# Altium PCB adapter.PcbDoc
Units mm, origin at the board's own origin, x right, y up, seen from the top; angles counter-clockwise.
Board outline 73.41 x 30.61 mm, 2 copper layers (Top Layer, Bottom Layer); 28 components, 29 nets, 120 pads, 0 vias.
Unrouted connection lines stored in the file: 26.
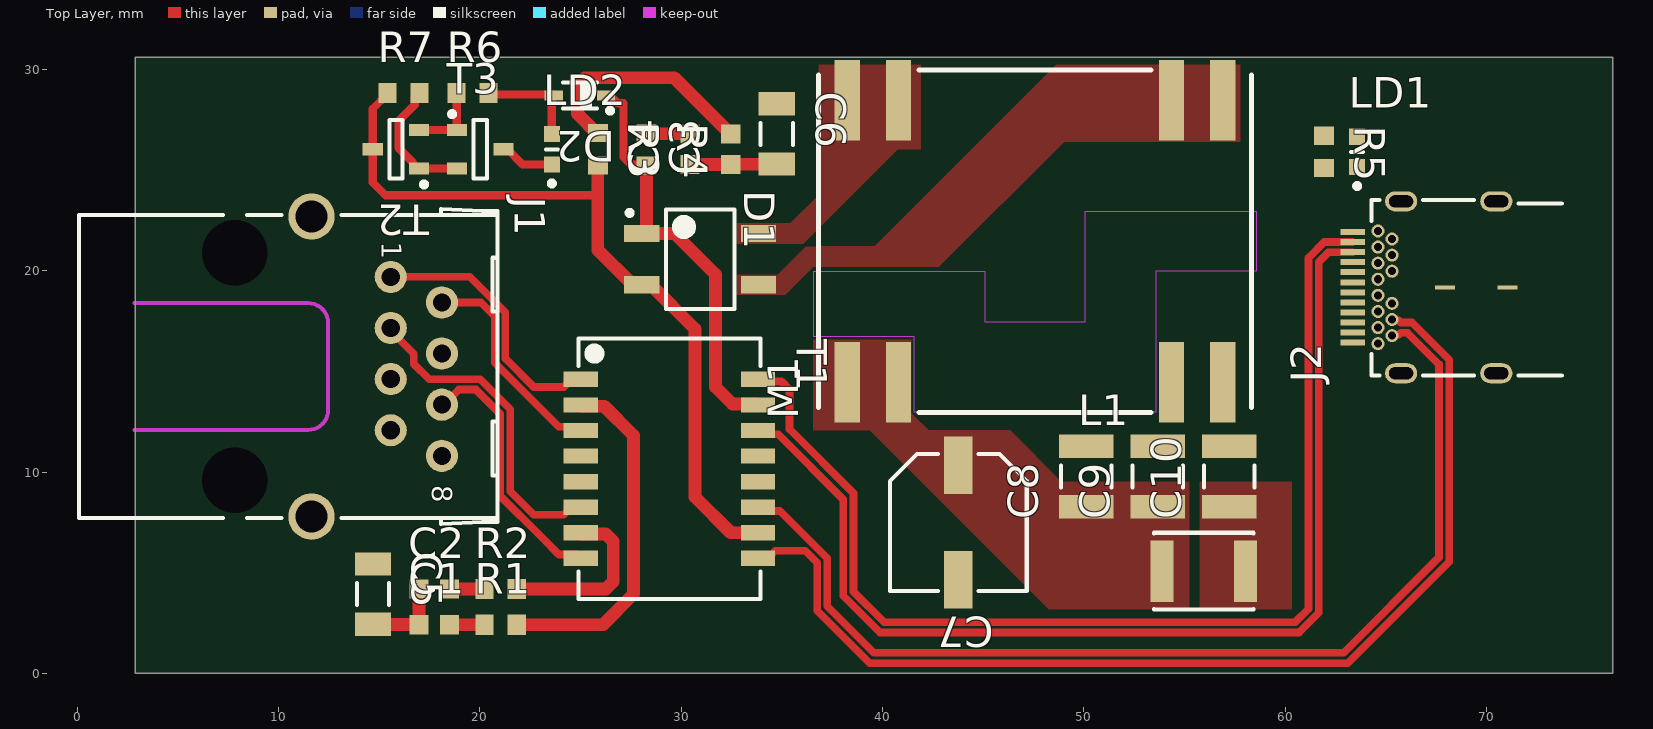
[diagram p0: Top Layer view]
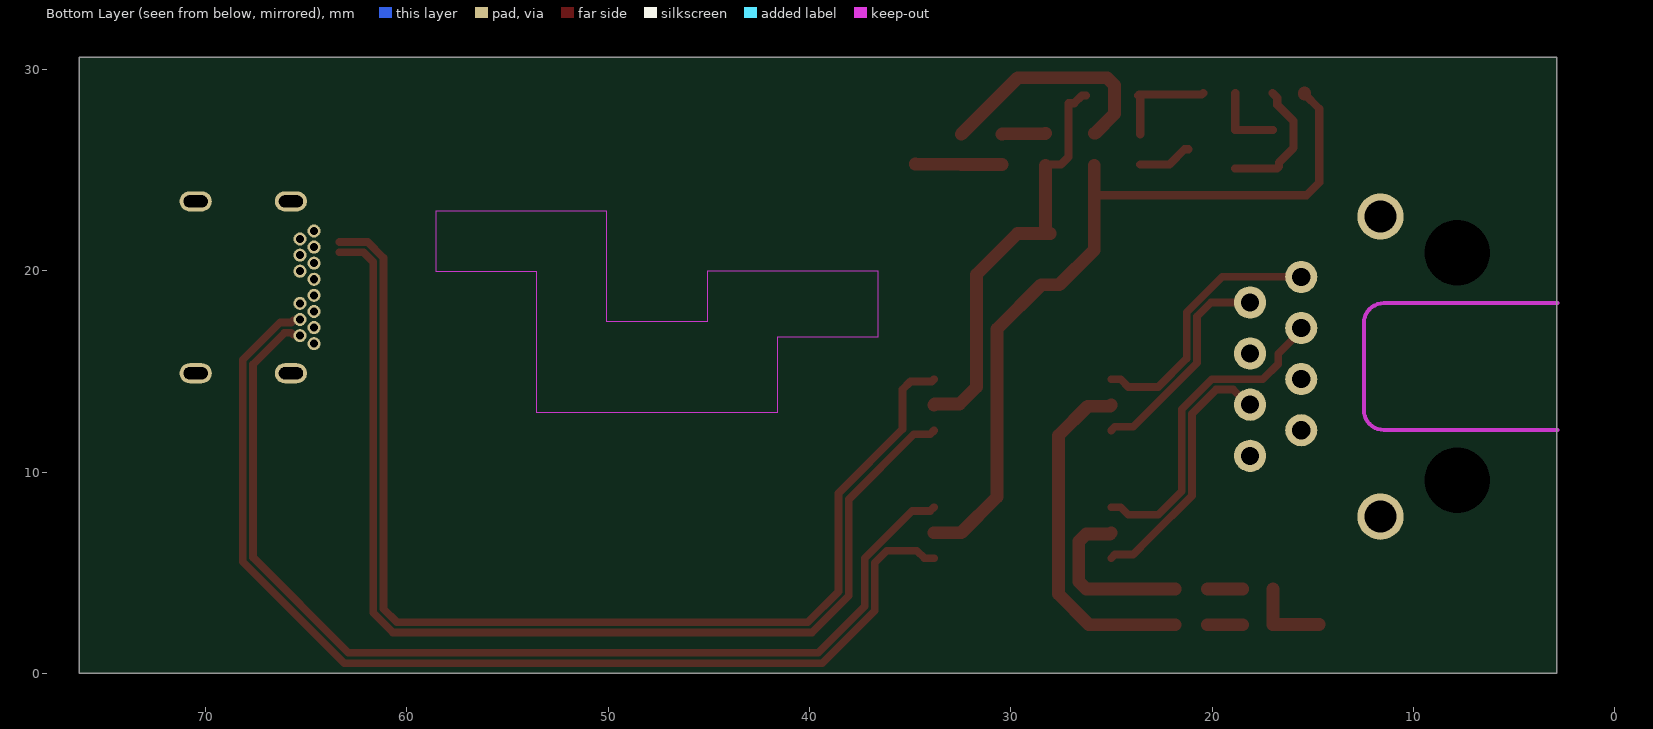
[diagram p1: Bottom Layer view, seen from below]
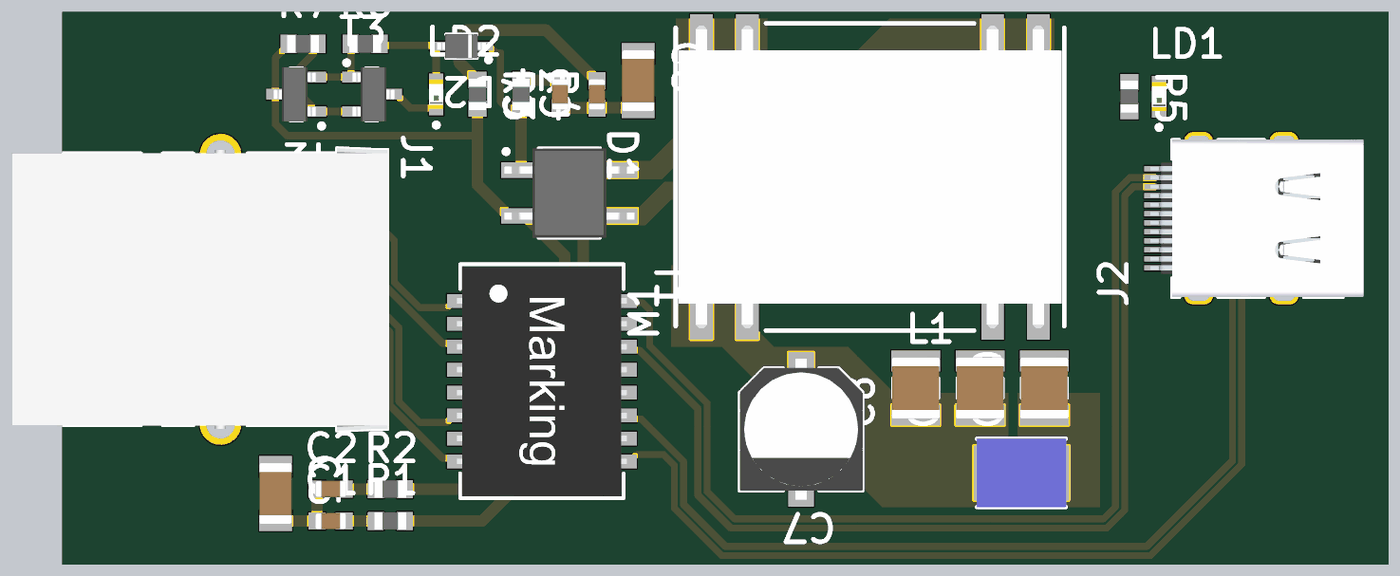
[diagram p2: 3D render of the assembled board from above, using the file's embedded part models]

## Layer stack, top to bottom
Top Solder: solder mask 0.0102, Solder Resist, Dk 3.5
Top Layer: signal copper 0.0356
Dielectric 1: dielectric 0.32, FR-4, Dk 4.8
Bottom Layer: signal copper 0.0356
Bottom Solder: solder mask 0.0102, Solder Resist, Dk 3.5

## Board outline
2.876,0 2.876,30.607 76.282,30.607 76.282,0

## Design rules (kind name [scope] priority, off if disabled: settings)
BoardOutlineClearance [All] p1: gap=0.2 ignorepadtopadclearanceinfootprint=FALSE
Clearance [All] p1: gap=0.127 ignorepadtopadclearanceinfootprint=FALSE except(0.25: Arc-Hole Track-Hole SMDPad-Hole THPad-Hole Via-Hole Fill-Hole Poly-Hole Region-Hole Text-Hole)
ComponentClearance [All] p1: gap=0.127 collisioncheckmode=3 verticalgap=0.127 showdistances=TRUE
DiffPairsRouting "Schematic Differential Pairs Routing_9" [InNet('ETHU_TX_N')] p1: maxlimit=0.127 minlimit=0.127 mostfreqgap=0.127 toplayer_minwidth=0.381 toplayer_maxwidth=0.381 toplayer_prefwidth=0.381 bottomlayer_minwidth=0.381 bottomlayer_maxwidth=0.381 bottomlayer_prefwidth=0.381 maxuncoupledlength=6.35
DiffPairsRouting "Schematic Differential Pairs Routing_8" [InNet('ETHU_RX_N')] p2: maxlimit=0.127 minlimit=0.127 mostfreqgap=0.127 toplayer_minwidth=0.381 toplayer_maxwidth=0.381 toplayer_prefwidth=0.381 bottomlayer_minwidth=0.381 bottomlayer_maxwidth=0.381 bottomlayer_prefwidth=0.381 maxuncoupledlength=6.35
DiffPairsRouting "Schematic Differential Pairs Routing_7" [InNet('ETHU_TX_P')] p3: maxlimit=0.127 minlimit=0.127 mostfreqgap=0.127 toplayer_minwidth=0.381 toplayer_maxwidth=0.381 toplayer_prefwidth=0.381 bottomlayer_minwidth=0.381 bottomlayer_maxwidth=0.381 bottomlayer_prefwidth=0.381 maxuncoupledlength=6.35
DiffPairsRouting "Schematic Differential Pairs Routing_6" [InNet('ETHU_RX_P')] p4: maxlimit=0.127 minlimit=0.127 mostfreqgap=0.127 toplayer_minwidth=0.381 toplayer_maxwidth=0.381 toplayer_prefwidth=0.381 bottomlayer_minwidth=0.381 bottomlayer_maxwidth=0.381 bottomlayer_prefwidth=0.381 maxuncoupledlength=6.35
DiffPairsRouting "Schematic Differential Pairs Routing_5" [InNet('PVBUS')] p5: maxlimit=0.127 minlimit=0.127 mostfreqgap=0.127 toplayer_minwidth=0.381 toplayer_maxwidth=0.381 toplayer_prefwidth=0.381 bottomlayer_minwidth=0.381 bottomlayer_maxwidth=0.381 bottomlayer_prefwidth=0.381 maxuncoupledlength=6.35
DiffPairsRouting "Schematic Differential Pairs Routing_4" [InNet('GND')] p6: maxlimit=0.127 minlimit=0.127 mostfreqgap=0.127 toplayer_minwidth=0.381 toplayer_maxwidth=0.381 toplayer_prefwidth=0.381 bottomlayer_minwidth=0.381 bottomlayer_maxwidth=0.381 bottomlayer_prefwidth=0.381 maxuncoupledlength=6.35
DiffPairsRouting "Schematic Differential Pairs Routing_3" [InNet('ETHJ_RX_N')] p7: maxlimit=0.127 minlimit=0.127 mostfreqgap=0.127 toplayer_minwidth=0.381 toplayer_maxwidth=0.381 toplayer_prefwidth=0.381 bottomlayer_minwidth=0.381 bottomlayer_maxwidth=0.381 bottomlayer_prefwidth=0.381 maxuncoupledlength=6.35
DiffPairsRouting "Schematic Differential Pairs Routing_2" [InNet('ETHJ_TX_N')] p8: maxlimit=0.127 minlimit=0.127 mostfreqgap=0.127 toplayer_minwidth=0.381 toplayer_maxwidth=0.381 toplayer_prefwidth=0.381 bottomlayer_minwidth=0.381 bottomlayer_maxwidth=0.381 bottomlayer_prefwidth=0.381 maxuncoupledlength=6.35
DiffPairsRouting "Schematic Differential Pairs Routing_1" [InNet('ETHJ_RX_P')] p9: maxlimit=0.127 minlimit=0.127 mostfreqgap=0.127 toplayer_minwidth=0.381 toplayer_maxwidth=0.381 toplayer_prefwidth=0.381 bottomlayer_minwidth=0.381 bottomlayer_maxwidth=0.381 bottomlayer_prefwidth=0.381 maxuncoupledlength=6.35
DiffPairsRouting "Schematic Differential Pairs Routing" [InNet('ETHJ_TX_P')] p10: maxlimit=0.127 minlimit=0.127 mostfreqgap=0.127 toplayer_minwidth=0.381 toplayer_maxwidth=0.381 toplayer_prefwidth=0.381 bottomlayer_minwidth=0.381 bottomlayer_maxwidth=0.381 bottomlayer_prefwidth=0.381 maxuncoupledlength=6.35
DiffPairsRouting DiffPairsRouting_100R [All] p11: maxlimit=0.127 minlimit=0.127 mostfreqgap=0.127 toplayer_minwidth=0.381 toplayer_maxwidth=0.381 toplayer_prefwidth=0.381 bottomlayer_minwidth=0.381 bottomlayer_maxwidth=0.381 bottomlayer_prefwidth=0.381 maxuncoupledlength=7.5
DiffPairsRouting [All] p12: maxlimit=0.254 minlimit=0.127 mostfreqgap=0.127 toplayer_minwidth=0.127 toplayer_maxwidth=25.4 toplayer_prefwidth=0.127 bottomlayer_minwidth=0.127 bottomlayer_maxwidth=25.4 bottomlayer_prefwidth=0.127 maxuncoupledlength=12.7
Height [All] p1: minheight=0 maxheight=1816.048 prefheight=12.7
HoleSize [All] p1: absolutevalues=TRUE maxlimit=6.3 minlimit=0.3 maxpercent=80.000 minpercent=20.000
HoleToHoleClearance [All] p1: gap=0.25 allowstackedmicrovias=FALSE
MinimumAnnularRing [All] p1: minimumring=0.076
MinimumSolderMaskSliver [All] p1: minsoldermaskwidth=0
PlaneClearance [All] p1: clearance=0.127
PlaneConnect PlaneConnectPowerPads [InPadClass('PowerPads')] p1: planeconnectstyle=Direct reliefexpansion=0.508 reliefentries=4 reliefconductorwidth=0.254 reliefairgap=0.254
PlaneConnect [All] p2: pad.planeconnectstyle=Relief pad.reliefexpansion=0.3 pad.reliefentries=4 pad.reliefconductorwidth=0.127 pad.reliefairgap=0.127 via.planeconnectstyle=Direct via.reliefexpansion=0.3 via.reliefentries=4 via.reliefconductorwidth=0.127 via.reliefairgap=0.127
PolygonConnect PolygonConnectPowerPads [All vs (InPadClass('PowerPads'))] p1: connectstyle=Direct reliefconductorwidth=0.254 reliefentries=4 polygonreliefangle="90 Angle" airgapwidth=0.254
PolygonConnect [All] p2: thpad.connectstyle=Relief thpad.reliefconductorwidth=0.127 thpad.reliefentries=4 thpad.polygonreliefangle="90 Angle" thpad.airgapwidth=0.127 smdpad.connectstyle=Direct smdpad.reliefconductorwidth=0.127 smdpad.reliefentries=4 smdpad.polygonreliefangle="90 Angle" smdpad.airgapwidth=0.127 via.connectstyle=Direct via.reliefconductorwidth=0.127 via.reliefentries=4 via.polygonreliefangle="90 Angle" via.airgapwidth=0.127
RoutingVias [All] p1: holewidth=0.3 width=0.6 viastyle="Through Hole" minholewidth=0.3 minwidth=0.6 maxholewidth=0.6 maxwidth=6.6
SilkToSilkClearance [All] p1: silktosilkclearance=0
SilkToSolderMaskClearance [IsPad] p1: minsilkscreentomaskgap=0.127 clearancetoexposedcopper=TRUE
SolderMaskExpansion [All] p1: expansion=0.075 istentingtop=FALSE
Width [All] p1: maxlimit=25.4 minlimit=0.127 preferedwidth=0.127 minimp=50.000000 maximp=50.000000 favimp=50.000000
20 further rules are at their usual default settings.

## Classes and differential pairs
differential pair ETHU_TX: +ETHU_TX_P -ETHU_TX_N
differential pair ETHU_RX: +ETHU_RX_P -ETHU_RX_N
differential pair ETHJ_TX: +ETHJ_TX_P -ETHJ_TX_N
differential pair ETHJ_RX: +ETHJ_RX_P -ETHJ_RX_N

## Components (designator, comment, footprint, x,y, rotation, side; value= is the part's Value field where it differs from the comment)
C1 "100nF" CAPC1608X90N 17.735,2.413 r0 top
C2 "100nF" CAPC1608X90N 17.735,4.191 r0 top
C3 "100nF" CAPC1608X90N 32.467,26.035 r90 top
C4 "100nF" CAPC1608X90N 30.435,26.035 r90 top
C5 "1nF" CAPC3216X180N 14.687,3.937 r270 top
C6 "1nF" CAPC3216X180N 34.753,26.797 r270 top
C7 "100uF" PNSC-EEEFK1C101P_L 43.77,7.493 r270 top
C8 "10uF" CAPC3225X270N 50.12,9.779 r90 top
C9 "10uF" CAPC3225X270N 53.676,9.779 r90 top
C10 "10uF" CAPC3225X270N 57.232,9.779 r90 top
D1 "MB6S" SOIC254P665X290-4N 30.943,20.574 r0 top
D2 "BZX384-C5V1" SOD2512X110N 24.974,28.702 r180 top
J1 "RJ45" MOLEX_44661-1001 11.639,15.24 r270 top
J2 "USB 3.1 Type C Receptacle" 632723300011 69.297,19.177 r90 top
L1 "1.5uH" IND_COILCRAFT_1812CS 55.962,5.08 r0 top
LD1 "Green" LED_LITEON_LTST-C193KGKT-5A 63.582,25.908 r90 top
LD2 "Green" LED_LITEON_LTST-C193KGKT-5A 23.577,26.035 r90 top
M1 "AG9905-MT" SILVERTEL_AG9900 47.58,21.463 r180 top
R1 "75" RESC1608X55N 21.037,2.413 r0 top
R2 "75" RESC1608X55N 21.037,4.191 r0 top
R3 "75" RESC1608X55N 25.863,26.035 r270 top
R4 "75" RESC1608X55N 28.276,26.035 r270 top
R5 "130" RESC1608X55N 61.931,25.908 r270 top
R6 "47k" RESC1608X55N 19.64,28.829 r0 top
R7 "330" RESC1608X55N 16.211,28.829 r0 top
T1 "749013011A" 749013011A 29.419,10.16 r270 top
T2 "MMBT3904" SOT95P230X110-3N 15.83,26.035 r180 top
T3 "MMBT3904" SOT95P230X110-3N 20.021,26.035 r0 top

## Footprints (in the part's own frame and the unit in brackets; to place one, negate y for a bottom-side part, rotate by r counter-clockwise, add the part's x,y. Pads: shape width x height; smd on the part's side, far side on the other; paste and mask are expansions set on the pad)
749013011A [mm] "SMD LAN Transformers, body 12.7x8.8mm, 16-Leads"
  rect 0.76x1.7 smd: 1(-4.445,-4.4) 2(-3.175,-4.4) 3(-1.905,-4.4) 4(-0.635,-4.4) 5(0.635,-4.4) 6(1.905,-4.4) 7(3.175,-4.4) 8(4.445,-4.4) 9(4.445,4.4) 10(3.175,4.4) 11(1.905,4.4) 12(0.635,4.4) 13(-0.635,4.4) 14(-1.905,4.4) 15(-3.175,4.4) 16(-4.445,4.4)
  silkscreen extent -6.48,-4.52 6.48,4.52, body extent -6.35,-4.7 6.35,4.7, height 6.35
632723300011 [mm] "USB 3.1 Type C Receptacle Horizontal THR"
  rect 0.3x1.2 smd: A1(-2.75,5.93) A2(-2.25,5.93) A3(-1.75,5.93) A4(-1.25,5.93) A5(-0.75,5.93) A6(-0.25,5.93) A7(0.25,5.93) A8(0.75,5.93) A9(1.25,5.93) A10(1.75,5.93) A11(2.25,5.93) A12(2.75,5.93)
  round 0.65 hole 0.4: B1(2.8,4.68) B2(2.4,3.98) B3(1.6,3.98) B4(1.2,4.68) B5(0.8,3.98) B6(0.4,4.68) B7(-0.4,4.68) B8(-0.8,3.98) B9(-1.2,4.68) B10(-1.6,3.98) B11(-2.4,3.98) B12(-2.8,4.68) G1(2,4.68) G2(-2,4.68)
  oval 1x1.6 hole 0.6 slot 1.2 at 90 deg: Shell(-4.27,-1.2) Shell(-4.27,3.53) Shell(4.27,-1.2) Shell(4.27,3.53)
  rect 0.2x1 smd: Shell(0,1.35) Shell(0,-1.75)
  silkscreen extent -4.37,-4.45 4.34,5, body extent -4.37,-5.6 4.37,6.19, height 3.05
CAPC1608X90N [mm] "Chip Capacitor, Body 1.6x0.8mm IPC Medium Density"
  rect 0.95x0.95 smd: 1(-0.75,0) 2(0.75,0)
  body extent -0.85,-0.45 0.85,0.45, height 0.9
CAPC3216X180N [mm] "Chip Capacitor, Body 3.2x1.6mm, IPC Medium Density"
  rect 1.15x1.8 smd: 1(-1.5,0) 2(1.5,0)
  silkscreen extent -0.55,-0.8 0.55,0.8, body extent -1.7,-0.9 1.7,0.9, height 1.8
CAPC3225X270N [mm] "Chip Capacitor, Body 3.2x2.5mm, IPC Medium Density"
  rect 1.15x2.7 smd: 1(-1.5,0) 2(1.5,0)
  silkscreen extent -0.55,-1.25 0.55,1.25, body extent -1.7,-1.35 1.7,1.35, height 2.7
IND_COILCRAFT_1812CS [mm] "SMD Inductor, Body Width 4.95mm Body Lenght 3.81mm Height 3.43mm, 1812CS Series"
  rect 1.14x3.05 smd: 1(-2.07,0) 2(2.07,0)
  silkscreen extent -2.47,-1.91 2.48,1.91, body extent -2.47,-1.9 2.48,1.91, height 3.43
LED_LITEON_LTST-C193KGKT-5A [mm] "SMD AlInGaP Green LED, Lens Water Clear, 2-Leads, Body 1.6x0.8mm"
  rect 0.8x0.8 smd: 1(-0.75,0) 2(0.75,0)
  silkscreen extent -1.82,-0.3 0,0.3, body extent -0.8,-0.4 0.8,0.4, height 0.35
MOLEX_44661-1001 [mm] "8 Contacts, 1.27mm Pitch, Through Hole Right Angle Magnetic and Modular Jack 8/8, Low Profile, Cat. 5 RJ45"
  round 1.6 hole 0.9: 1(-4.456,3.937) 2(-3.186,6.477) 3(-1.916,3.937) 4(-0.646,6.477) 5(0.624,3.937) 6(1.894,6.477) 7(3.164,3.937) 8(4.434,6.477)
  round 0.75 hole 3.25 unplated mask+1.25: MECH1(-5.65,-3.81) MECH2(5.65,-3.81)
  round 2.3 hole 1.6: SHIELD(-7.453,0) SHIELD(7.453,0)
  Keep-Out Layer lines w0.2: 3.15,-8.79 3.15,-0.17 ccw(c2.15,-0.17) 2.15,0.83 -2.15,0.83 ccw(c-2.15,-0.17) -3.15,-0.17 -3.15,-8.79
  silkscreen extent -7.82,-11.54 7.82,9.24, body extent -7.82,-11.54 7.82,9.24, height 9.53
PNSC-EEEFK1C101P_L [mm] "Aluminum Electrolytic Capacitor, Body 6.8x6.8mm, IPC High Density"
  rect 2.85x1.4 smd: 1(-2.85,0) 2(2.85,0)
  silkscreen extent -3.4,-3.4 3.4,3.4, body extent -3.9,-3.4 3.9,3.4, height 6.3
RESC1608X55N [mm] "Chip Resistor, EIA 0603, Metric 1608, Body 1.6x0.8mm, IPC Medium Density"
  rect 0.9x1 smd: 1(-0.8,0) 2(0.8,0)
  body extent -0.87,-0.47 0.88,0.48, height 0.55
SILVERTEL_AG9900 [mm]
  rect 1.25x4 smd: 1(9.325,7) 2(6.785,7) 3(-6.785,7) 4(-9.325,7) 5(-9.325,-7) 6(-6.785,-7) 7(6.785,-7) 8(9.325,-7)
  Keep-Out Layer region: 11,4.75 11,1.5 2.5,1.5 2.5,4 -2.5,4 -2.5,-1.5 -11,-1.5 -11,1.5 -6,1.5 -6,8.5 6,8.5 6,4.75
  silkscreen extent -10.75,-8.5 10.75,8.5, body extent -10.59,-8.37 10.6,8.37, height 13.35
SOD2512X110N [mm] "Small Outline Diode (SOD-323), 1.70mm W X 1.25mm L X 1.10mm H body,  IPC Medium Density"
  rect 0.9x0.5 smd: 1(-1.3,0) 2(1.3,0)
  silkscreen extent -1.63,-0.65 0.85,0.87, body extent -1.35,-0.67 1.35,0.68, height 1.1
SOIC254P665X290-4N [mm] "SOIC, 4-Leads, Body 3.9x4.75mm, Pitch 2.54mm, IPC Medium Density"
  rect 1.75x0.85 smd: 1(-2.9,1.27) 2(-2.9,-1.27) 3(2.9,-1.27) 4(2.9,1.27)
  silkscreen extent -3.62,-2.47 1.7,2.47, body extent -3.6,-2.47 3.6,2.48, height 2.9
SOT95P230X110-3N [mm] "SOT23, 3 pin, Pitch 0.95mm - 1.3mm W X 2.9mm L X 1.1mm H, IPC Medium Density"
  rect 1x0.6 smd: 1(-1.15,0.95) 2(-1.15,-0.95) 3(1.15,0)
  silkscreen extent -1.53,-1.45 0.33,1.87, body extent -1.08,-1.5 1.25,1.5, height 1.1

## Part data
C1 C2 C3 C4: library part CC0603_100NF_100V_10%_X7R, "Non-polarised capacitor", Case=0603, Manufacturer=GENERIC, Manufacturer1 ComponentHeight=0.9mm, Manufacturer1 Example=MURATA, Manufacturer1 Part Number=GRM188R72A104KA35D, Tolerance=±10%, Voltage=100V, Author="CERN DEM JLC", Component Type=Standard, CreateDate=11.12.2013, HelpURL=\\cern.ch\dfs\Applications\Altium\Datasheets\CC0603_MURATA_GRM188R72A104KA35D.pdf, LatestRevisionDate=11.12.2013, Manufacturer Part Number=CC0603_100NF_100V_10%_X7R, Mounted=Yes, Part Description="SMD Multilayer Chip Ceramic Capacitor", Part Number=CC0603_100NF_100V_10%_X7R, Pin Count=2, Sense=No, SMD=Yes, Socket=No, Status=None, TC=X7R
C5 C6: library part CC1206_1NF_2KV_10%_X7R, "Non-polarised capacitor", Case=1206, Manufacturer=GENERIC, Manufacturer1 ComponentHeight=1.8mm, Manufacturer1 Example=AVX, Manufacturer1 Part Number=1206GC102KAT2A, Tolerance=±10%, Voltage=2kV, Author="CERN DEM JLC", Component Type=Standard, CreateDate=19.11.2012, HelpURL=\\cern.ch\dfs\Applications\Altium\Datasheets\CC1206_X7R_AVX_HV-MLC.pdf, LatestRevisionDate=17.05.2017, Manufacturer Part Number=CC1206_1NF_2KV_10%_X7R, Mounted=Yes, Part Description="High Voltage MLC Chip Capacitor", Part Number=CC1206_1NF_2KV_10%_X7R, Pin Count=2, Sense=No, SMD=Yes, Socket=No, Status=None, TC=X7R
C7: library part CMP-2000-06203-1, "Aluminum Electrolytic Capacitor, 100 uF, 20%, 16 V, -55 to 105 degC, 2-Pin SMD, RoHS, Tape and Reel", Capacitance=100µF, Case Size/Dimension=Ø6.3x5.8mm, Lifetime@Temperature=2000Hrs@105°C, Manufacturer=Panasonic, Operating Temp Range=-55to+105°C, Operating Temp-Max=105°C, Package Description="2-Pin Surface Mount Device, Body 6.6 x 6.6 mm", Package Reference=EEEFK1C101P, Rated Voltage=16V, Ripple Current=240mA, Datasheet URL=http://datasheet.octopart.com/EEEFK1C101P-Panasonic-datasheet-13266987.pdf, Datasheet Version=11/2012, Impedance=0.36O, Manufacturer URL=http://www.panasonic.com/, Mounting Technology=SurfaceMount, Series=FK, Type=Can
C8 C9 C10: library part CC1210_10UF_25V_10%_X7R, "Non-polarised capacitor", Case=1210, Manufacturer=GENERIC, Manufacturer1 ComponentHeight=2.7mm, Manufacturer1 Example=KEMET, Manufacturer1 Part Number=C1210C106K4RACTU, Tolerance=±10%, Voltage=25V, Author="CERN DEM JLC", Component Type=Standard, CreateDate=05.05.2009, HelpURL=\\cern.ch\dfs\Applications\Altium\Datasheets\CC1210_X7R_KEMET.pdf, LatestRevisionDate=01.04.2010, Manufacturer Part Number=CC1210_10UF_25V_10%_X7R, Mounted=Yes, Part Description="SMD Multilayer Chip Ceramic Capacitor", Part Number=CC1210_10UF_25V_10%_X7R, Pin Count=2, Sense=No, SMD=Yes, Socket=No, Status=None, TC=X7R
D1: "Bridge Rectifier 1AC 2AC 3+ 4-", Case=SOIC4, Manufacturer="VISHAY GENERAL SEMICONDUCTOR", Power=0.5A, Voltage=600V, Author="CERN DEM MR", Bonding=No, Component Type=Standard, ComponentHeight=2.9mm, CreateDate=15.04.2016, Device=MB6S, HelpURL=\\cern.ch\dfs\Applications\Altium\Datasheets\MB6S.pdf, LatestRevisionDate=15.04.2016, Manufacturer Part Number=MB6S, Mounted=Yes, PackageDescription="SOIC, 4-Leads, Body 3.9x4.75mm, Pitch 2.54mm, IPC Medium Density", Part Description="Miniature Glass Passivated Fast Recovery Surface Mount Bridge Rectifier", Part Number=MB6S, Pin Count=4, PressFit=No, Sense=No, SMD=Yes, Socket=No
D2: "Zener Diode", Case=SOD-323, Manufacturer=NEXPERIA, Power=300mW, Voltage=5.1V, Author="CERN DEM MR", Bonding=No, Component Type=Standard, ComponentHeight=1.1mm, CreateDate=24.07.2018, Device=BZX384-C5V1, HelpURL=\\cern.ch\dfs\Applications\Altium\Datasheets\BZX384.pdf, LatestRevisionDate=24.07.2018, Manufacturer Part Number=BZX384-C5V1, Mounted=Yes, PackageDescription="Small Outline Diode (SOD-323), 1.70mm W X 1.25mm L X 1.10mm H body,  IPC Medium Density", Part Description="Zener Voltage Regulator", Part Number=BZX384-C5V1, Pin Count=2, PressFit=No, Sense=No, SMD=Yes, Socket=No
J1: library part MOLEX_44661-1001, "Connector RJ45 + Shield", Manufacturer=MOLEX, Manufacturer Part Number=44661-1001, Author="CERN DEM BC", Component Type=Standard, ComponentHeight=9.53mm, CreateDate=22.02.2021, Family=RJ45, HelpURL=\\cern.ch\dfs\Applications\Altium\Datasheets\MOLEX_44661-1001.pdf, LatestRevisionDate=22.02.2021, Mounted=Yes, Part Description="8 Contacts, 1.27mm Pitch, Through Hole Right Angle Magnetic and Modular Jack 8/8, Low Profile, Cat. 5 RJ45", Part Number=MOLEX_44661-1001, Pin Count=8, PressFit=No, Sense=No, SMD=No, Socket=No, Status=None
J2: library part 632723300011, "USB 3.1 Type C, Receptacle, Horizontal, THR", Manufacturer="Wurth Elektronik", Operating Temperature="-40 to +105degC", Rated Current=5A, Working Voltage=20VAC, Application="USB 3.1", ComponentLink1Description=Manufacturer, ComponentLink1URL=http://www.we-online.de, ComponentLink2Description=Datasheet, ComponentLink2URL=https://katalog.we-online.com/em/datasheet/632723300011.pdf, Gender=Receptacle, Interface Type="Type C", Manufacturer Part Number=632723300011, Mounting Technology=THR, Packaging="Tape and Reel", Pin Number=24, Published Date="August 2020", Type=Horizontal
L1: library part IND_1.5UH_2%_COILCRAFT_1812CS, "Inductor With Core", Case=1812, Manufacturer=COILCRAFT, Manufacturer Part Number=1812CS-152XGL, Power=430mA, Resistance=1.6R, Tolerance=±2%, Author="CERN DEM JMW", Component Type=Standard, ComponentHeight=3.43mm, CreateDate=26.10.2015, HelpURL=\\cern.ch\dfs\Applications\Altium\Datasheets\IND_COILCRAFT_1812CS.pdf, LatestRevisionDate=26.10.2015, Mounted=Yes, Part Description="SMT Chip Inductor", Part Number=IND_1.5UH_2%_COILCRAFT_1812CS, Pin Count=2, Sense=No, SMD=Yes, Socket=No, Status=None
LD1 LD2: library part LED_LITEON_LTST-C193KGKT-5A, "LED Green 1C 2A", Case=0603, Manufacturer="LITE-ON SEMICONDUCTOR", Manufacturer Part Number=LTST-C193KGKT-5A, Author="CERN DEM BC", Bonding=No, Color=Green, Component Type=Standard, ComponentHeight=0.35mm, CreateDate=11.11.2020, HelpURL=\\cern.ch\dfs\Applications\Altium\Datasheets\LED_LITEON_LTST-C193KGKT-5A.pdf, LatestRevisionDate=11.11.2020, Mounted=Yes, PackageDescription="SMD AlInGaP Green LED, Lens Water Clear, 2-Leads, Body 1.6x0.8mm", Part Description="Extra Thin SMD Chip LED, Ultra Bright AlInGaP Green, Lens Water Clear", Part Number=LED_LITEON_LTST-C193KGKT-5A, Pin Count=2, PressFit=No, Sense=No, SMD=Yes, Socket=No
M1: "Ultra Miniature PoE, 5V, w/Thermal Protection", Manufacturer=Silvertel, Supplier Part Number 1=480-AG9905MT, Manufacturer Part Number=AG9905-MT, Pricing 1="1=8,19000, 10=8,13000, 20=7,75000, 50=7,75000, 100=7,14000, 1000=7,14000, 10000=7,14000 (USD)", RoHS=No, Supplier 1=Mouser
R1 R2 R3 R4: library part R0603_75R_1%_0.1W_100PPM, "Resistor - 1%", Case=0603, Manufacturer=GENERIC, Manufacturer1 ComponentHeight=0.55mm, Manufacturer1 Example="NIC COMPONENT", Manufacturer1 Part Number=NRC06F75R0TRF, Power=0.1W, Tolerance=±1%, Author="CERN DEM JLC", Component Type=Standard, CreateDate=03.12.2007, HelpURL=\\cern.ch\dfs\Applications\Altium\Datasheets\R0603_NIC_NRC.pdf, LatestRevisionDate=13.03.2008, Manufacturer Part Number=R0603_75R_1%_0.1W_100PPM, Mounted=Yes, Part Description="General Purpose Thick Film Chip Resistor", Part Number=R0603_75R_1%_0.1W_100PPM, Pin Count=2, PressFit=No, Sense=No, SMD=Yes, Socket=No, Status=Preferred, TC=±100ppm/°C
R5: library part R0603_130R_1%_0.1W_100PPM, "Resistor - 1%", Case=0603, Manufacturer=GENERIC, Manufacturer1 ComponentHeight=0.55mm, Manufacturer1 Example="NIC COMPONENT", Manufacturer1 Part Number=NRC06F1300TRF, Power=0.1W, Tolerance=±1%, Author="CERN DEM JLC", Component Type=Standard, CreateDate=03.12.2007, HelpURL=\\cern.ch\dfs\Applications\Altium\Datasheets\R0603_NIC_NRC.pdf, LatestRevisionDate=13.03.2008, Manufacturer Part Number=R0603_130R_1%_0.1W_100PPM, Mounted=Yes, Part Description="General Purpose Thick Film Chip Resistor", Part Number=R0603_130R_1%_0.1W_100PPM, Pin Count=2, PressFit=No, Sense=No, SMD=Yes, Socket=No, Status=Preferred, TC=±100ppm/°C
R6: library part R0603_47K_1%_0.1W_100PPM, "Resistor - 1%", Case=0603, Manufacturer=GENERIC, Manufacturer1 ComponentHeight=0.55mm, Manufacturer1 Example="NIC COMPONENT", Manufacturer1 Part Number=NRC06F4702TRF, Power=0.1W, Tolerance=±1%, Author="CERN DEM JLC", Component Type=Standard, CreateDate=03.12.2007, HelpURL=\\cern.ch\dfs\Applications\Altium\Datasheets\R0603_NIC_NRC.pdf, LatestRevisionDate=13.03.2008, Manufacturer Part Number=R0603_47K_1%_0.1W_100PPM, Mounted=Yes, Part Description="General Purpose Thick Film Chip Resistor", Part Number=R0603_47K_1%_0.1W_100PPM, Pin Count=2, PressFit=No, Sense=No, SMD=Yes, Socket=No, Status=Preferred, TC=±100ppm/°C
R7: library part R0603_330R_1%_0.1W_100PPM, "Resistor - 1%", Case=0603, Manufacturer=GENERIC, Manufacturer1 ComponentHeight=0.55mm, Manufacturer1 Example="NIC COMPONENT", Manufacturer1 Part Number=NRC06F3300TRF, Power=0.1W, Tolerance=±1%, Author="CERN DEM JLC", Component Type=Standard, CreateDate=03.12.2007, HelpURL=\\cern.ch\dfs\Applications\Altium\Datasheets\R0603_NIC_NRC.pdf, LatestRevisionDate=13.03.2008, Manufacturer Part Number=R0603_330R_1%_0.1W_100PPM, Mounted=Yes, Part Description="General Purpose Thick Film Chip Resistor", Part Number=R0603_330R_1%_0.1W_100PPM, Pin Count=2, PressFit=No, Sense=No, SMD=Yes, Socket=No, Status=Preferred, TC=±100ppm/°C
T1: "WE-LAN LAN Transformer, SMT, 10/100 Base-T, 1 port", Inductance=350uH, Insulation Test Voltage=1500Vrms, Manufacturer="Wurth Elektronik", Operating Temperature="-40 to +105degC", PoE Current=350mA, ComponentLink1Description=Manufacturer, ComponentLink1URL=http://www.we-online.de, ComponentLink2Description=Datasheet, ComponentLink2URL=https://www.we-online.com/catalog/datasheet/749013011A.pdf, Data Rate="10/100 Base-T", HPLE=No, Manufacturer Part Number=749013011A, Mounting Technology=SMT, Number of Ports=1, Packaging="Tape and Reel", Published Date="March 2020", Turns Ratio=1:1
T2 T3: "NPN Transistor", Case=SOT23-3, Manufacturer="NXP SEMICONDUCTORS", Author="CERN DEM JLC", Bonding=No, Component Type=Standard, ComponentHeight=1.1mm, CreateDate=10.02.2010, Device=MMBT3904, HelpURL=\\cern.ch\dfs\Applications\Altium\Datasheets\MMBT3904.pdf, LatestRevisionDate=10.02.2010, Manufacturer Part Number=MMBT3904, Mounted=Yes, PackageDescription="SOT23, 0.95mm Pitch; 3 Pin, 1.30mm W X 2.90mm L X 1.10mm H body, IPC Medium Density", Part Description="40V 200mA NPN Switching Transistor", Part Number=MMBT3904, Pin Count=3, PressFit=No, Sense=No, SMD=Yes, Socket=No

## Nets (pads, with @x,y where several pads share a name; then routed paths per layer and width w, separated by ;. In a path a pad name is that pad's centre, name@x,y a point inside that pad or via, vN(x,y) a via of type N, cw(c..) or ccw(c..) an arc to the next point about the centre after c; other vN are vias at no path point)
ETHJ_RX_N: J1.6 T1.8 | length 13.1
  Top Layer w0.381: J1.6 18.198,13.346 18.949,14.097 19.811,14.097 21.004,12.904 21.004,8.83 23.102,6.731 23.931,5.903 24.831,5.903 T1.8
ETHJ_RX_P: J1.3 T1.6 | length 16.2
  Top Layer w0.381: J1.3 15.576,17.018 16.719,15.875 16.719,15.367 17.481,14.605 20.021,14.605 21.512,13.114 21.512,9.04 22.678,7.874 24.168,7.874 24.549,8.255 T1.6
ETHJ_TX_N: J1.2 T1.3 | length 10.9
  Top Layer w0.381: J1.2 20.056,18.426 20.751,17.731 20.751,15.433 23.931,12.253 24.831,12.253 T1.3
ETHJ_TX_P: J1.1 T1.1 | length 13.2
  Top Layer w0.381: J1.1 19.504,19.696 21.259,17.942 21.259,15.643 22.678,14.224 24.168,14.224 24.549,14.605 T1.1
ETHU_RX_N: J2.B10 T1.9 | length 54
  Top Layer w0.381: T1.9 34.289,5.715 34.67,6.096 36.161,6.096 36.76,5.497 36.76,3.117 39.369,0.508 63.119,0.508 68.154,5.543 68.154,15.57 66.293,17.431 65.746,17.431 65.651,17.526 65.369,17.526 J2.B10
ETHU_RX_P: J2.B11 T1.11 | length 52.8
  Top Layer w0.381: T1.11 34.007,8.067 34.908,8.067 37.268,5.707 37.268,3.328 39.579,1.016 62.909,1.016 67.646,5.754 67.646,15.359 66.083,16.923 65.746,16.923 65.651,16.828 65.369,16.828 J2.B11
ETHU_TX_N: J2.A10 T1.14 | length 54.5
  Top Layer w0.381: T1.14 34.009,11.875 34.816,11.875 38.055,8.636 38.055,3.854 39.877,2.032 60.706,2.032 61.677,3.003 61.677,20.436 62.16,20.919 J2.A10@63.353,20.919
ETHU_TX_P: J2.A11 T1.16 | length 56.6
  Top Layer w0.381: T1.16 33.927,14.497 34.988,14.497 35.388,14.097 35.388,12.125 38.563,8.95 38.563,4.064 40.087,2.54 60.496,2.54 61.169,3.214 61.169,20.646 61.95,21.427 J2.A11@63.353,21.427
GND: C7.2 C8.2 C9.2 C10.2 J2.A1 J2.A12 J2.B1 J2.B12 J2.G1 J2.G2 M1.3 R5.1
NetC1_1: C1.1 C2.1 C5.2 | length 4.1
  Top Layer w0.635: C5.2 14.699,2.425 16.973,2.425 C1.1 C2.1
NetC1_2: C1.2 R1.1 | length 1.8
  Top Layer w0.635: C1.2 R1.1
NetC2_2: C2.2 R2.1 | length 1.8
  Top Layer w0.635: C2.2 R2.1
NetC3_1: C3.1 C4.1 C6.2 | length 4.3
  Top Layer w0.635: C4.1 C3.1 32.473,25.291 34.747,25.291 C6.2
NetC3_2: C3.2 R3.1 | length 11.8
  Top Layer w0.635: R3.1 25.813,26.835 24.847,27.801 24.847,29.219 25.219,29.591 29.661,29.591 C3.2
NetC4_2: C4.2 R4.1 | length 2.2
  Top Layer w0.635: R4.1 28.301,26.81 30.41,26.81 C4.2
NetC7_1: C7.1 C8.1 C9.1 L1.1 M1.1 M1.2
NetD1_1: D1.1 D2.1 R4.2 T1.15 | length 21
  Top Layer w0.406: D2.1 26.474,28.702 26.855,28.321 27.133,28.321 27.133,25.654 27.514,25.273 28.238,25.273 R4.2
  Top Layer w0.635: D1.1 D1.1@28.169,21.844 ; R4.2 28.276,21.952 D1.1@28.169,21.844 ; T1.15 33.778,13.376 32.553,13.376 31.705,14.224 31.705,19.812 29.673,21.844 D1.1@28.169,21.844
NetD1_2: D1.2 R3.2 R7.1 T1.10 T2.3 | length 39.1
  Top Layer w0.406: R7.1@15.411,28.779 14.68,28.048 T2.3 14.68,24.391 15.322,23.749 25.863,23.749
  Top Layer w0.635: R7.1@15.411,28.779 R7.1 ; R3.2 25.863,23.749 25.863,21.034 27.593,19.304 D1.2 28.493,19.304 30.689,17.108 30.689,8.763 32.467,6.985 T1.10
NetD1_3: D1.3 M1.5 M1.6
NetD1_4: D1.4 M1.7 M1.8
NetD2_2: D2.2 LD2.2 R6.2 | length 5.3
  Top Layer w0.406: R6.2 20.52,28.749 23.627,28.749 D2.2 23.624,28.702 23.577,28.655 LD2.2
NetLD1_1: LD1.1 R5.2
NetLD2_1: LD2.1 T3.3 | length 2.7
  Top Layer w0.406: T3.3 21.371,26.035 22.121,25.285 LD2.1
NetR1_2: R1.2 T1.2 | length 17.6
  Top Layer w0.635: R1.2 26.117,2.413 27.641,3.937 27.641,11.811 26.18,13.272 25.082,13.272 T1.2
NetR2_2: R2.2 T1.7 | length 8.7
  Top Layer w0.635: R2.2 26.253,4.191 26.625,4.563 26.625,6.551 26.253,6.922 25.082,6.922 T1.7
NetR6_1: R6.1 T2.2 T3.1 | length 3.7
  Top Layer w0.406: T2.2 T3.1 18.856,27 18.856,28.813 R6.1
NetR7_2: R7.2 T2.1 T3.2 | length 6.6
  Top Layer w0.406: R7.2 16.764,28.582 16.764,28.239 15.957,27.432 15.957,26.108 16.683,25.382 16.683,25.182 16.78,25.085 T2.1 T3.2
PVBUS: C10.1 J2.A4 J2.A9 J2.B4 J2.B9 L1.2 LD1.2
SHIELD: C5.1 C6.1 J1.SHIELD J2.Shell
pads on no net: J1.4 J1.5 J1.7 J1.8 J1.MECH1 J1.MECH2 J2.A2 J2.A3 J2.A5 J2.A6 J2.A7 J2.A8 J2.B2 J2.B3 J2.B5 J2.B6 J2.B7 J2.B8 M1.4 T1.4 T1.5 T1.12 T1.13

## Polygon pours and split planes (outlines as drawn)
NetD1_3 on Top Layer "PA3V3_L01_P-001" (solid, pour order 3): 32.766,19.812 32.766,18.796 35.179,18.796 36.576,20.193 42.799,20.193 49.022,26.416 57.785,26.416 57.785,30.226 48.641,30.226 39.624,21.209 36.195,21.209 34.798,19.812
NetD1_4 on Top Layer "PA3V3_L01_P-001" (solid, pour order 2): 32.766,22.352 32.766,21.336 36.068,21.336 40.767,26.035 41.91,26.035 41.91,27.178 41.91,30.226 36.83,30.226 36.83,23.749 35.433,22.352
PVBUS on Top Layer "PA3V3_L01_P-001" (solid, pour order 1): 55.753,9.525 60.325,9.525 60.325,3.175 55.753,3.175
NetC7_1 on Top Layer "PA3V3_L01_P-001" (solid, pour order 0): 36.576,16.637 41.529,16.637 41.529,12.827 42.291,12.065 46.355,12.065 48.895,9.525 46.99,9.525 55.245,9.525 55.245,3.175 48.26,3.175 39.37,12.065 36.576,12.065

## Text inside footprints (layer, text, board x,y; h text height)
J1: Top Overlay "1" at 15.139,21.44 h1 r270; Top Overlay "8" at 17.639,9.34 h1 r270; Drill Drawing "6.3" at 8.139,15.436 h1 r270; Drill Drawing "9.62" at 4.339,15.64 h1; Drill Drawing "r 1.0" at 9.939,16.14 h1 r270; Mechanical 14 "1" at 15.139,21.44 h1 r270; Mechanical 14 "8" at 17.639,9.34 h1 r270
J2: Mechanical 2 "PCB Edge" at 74.897,17.477 h0.61 r90